# Altium PCB TDII_PCB(backup)_R00.PcbDoc
Units mm, origin at the board's own origin, x right, y up, seen from the top; angles counter-clockwise.
Board outline 45 x 70.5 mm, 2 copper layers (Top Layer, Bottom Layer); 84 components, 68 nets, 353 pads, 59 vias.
Unrouted connection lines stored in the file: 46.
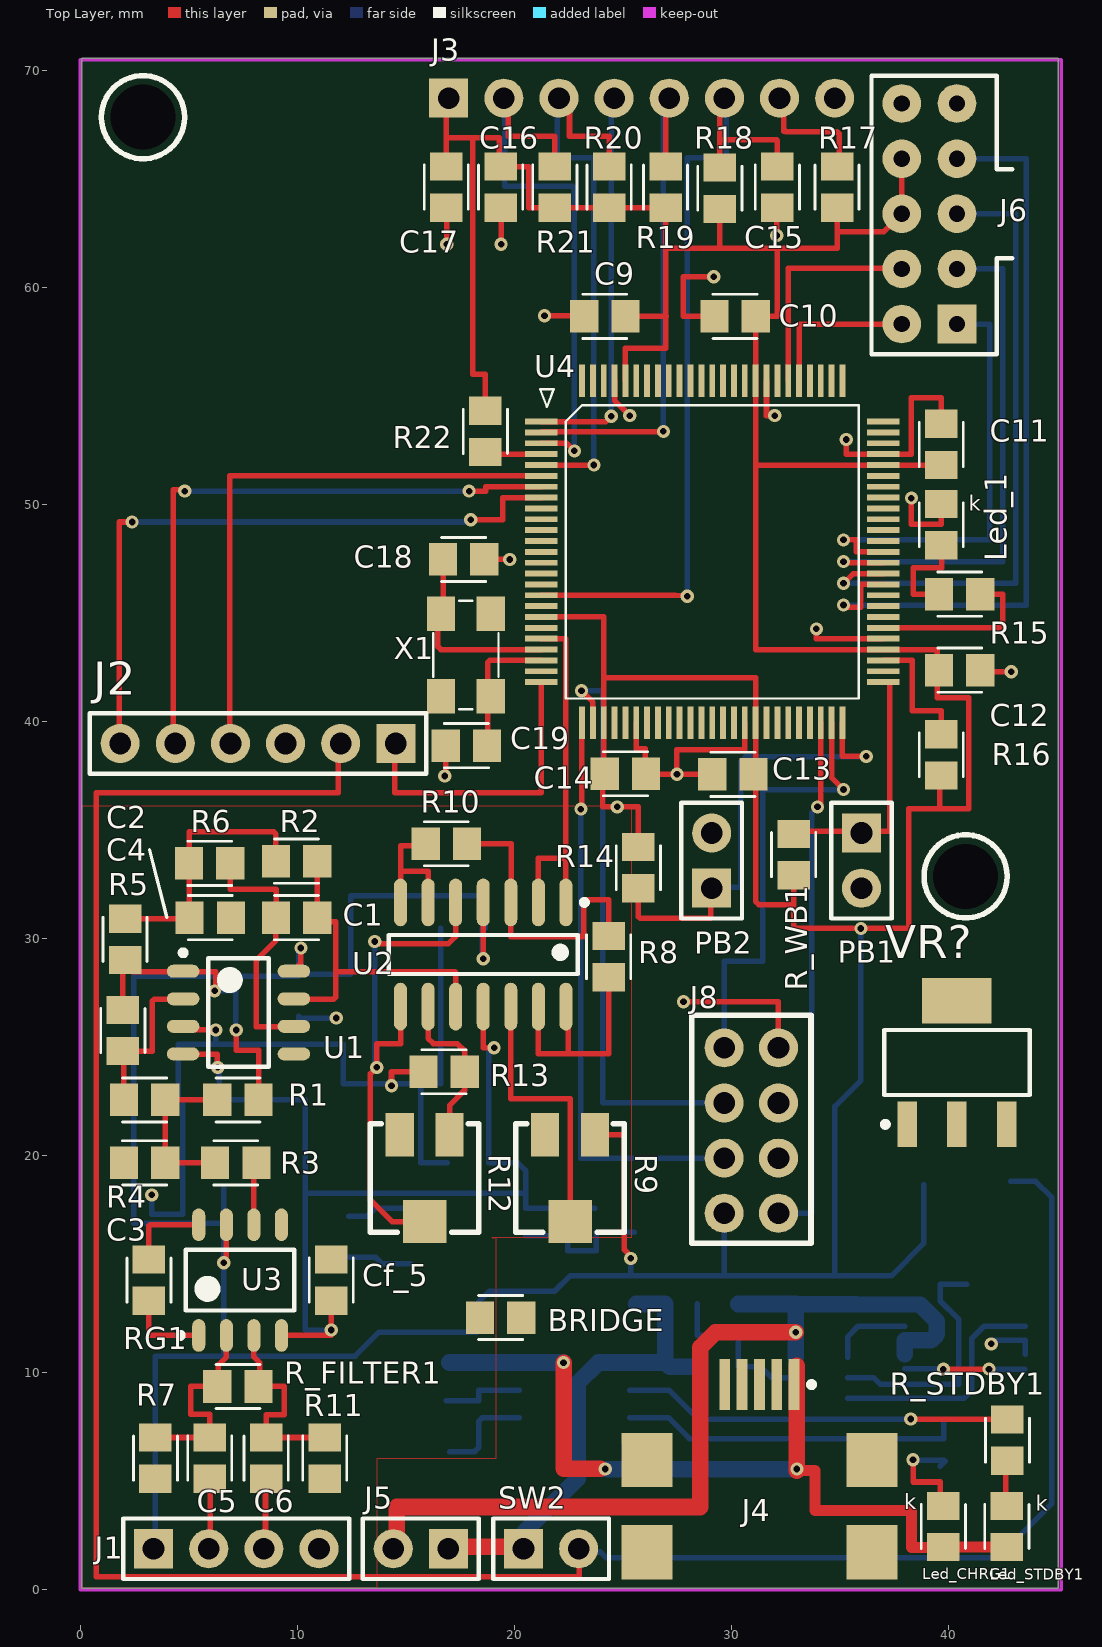
[diagram p0: Top Layer view]
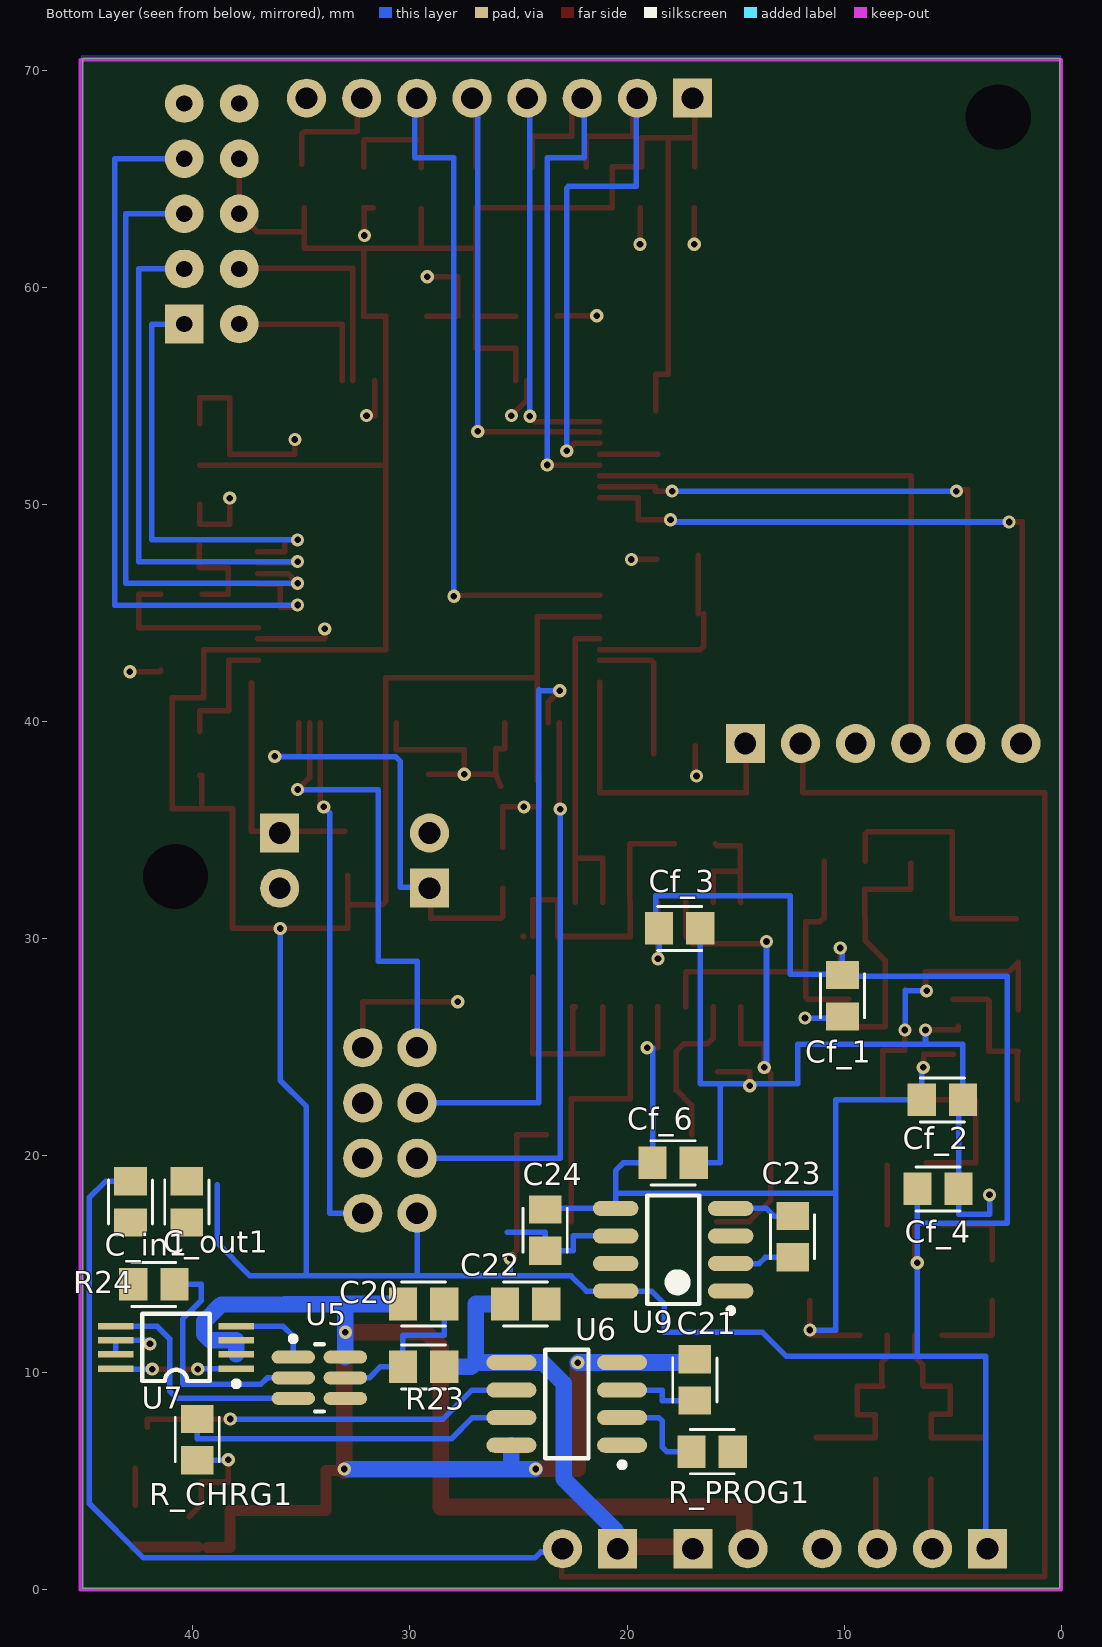
[diagram p1: Bottom Layer view, seen from below]

## Layer stack, top to bottom
Top Layer: signal copper 0.0356
Dielectric: dielectric 0.32, FR-4, Dk 4.8
Bottom Layer: signal copper 0.0356

## Board outline
0.075,0.075 0.075,70.575 45.075,70.575 45.075,0.075

## Design rules (kind name [scope] priority, off if disabled: settings)
Clearance Clearance_3 [InPolygon] p1: gap=0.406
Clearance [All] p2: gap=0.152
PolygonConnect [All] p1: connectstyle=Relief reliefconductorwidth=0.254 reliefentries=4 polygonreliefangle="90 Angle"
RoutingVias [All] p1: holewidth=0.305 width=0.61 viastyle="Through Hole" minholewidth=0.305 minwidth=0.61 maxholewidth=0.305 maxwidth=0.61
SilkscreenOverComponentPads [All] p1: minsilkscreentomaskgap=0.254
SolderMaskExpansion [All] p1: expansion=0.102
Width Width_1 [InNet('+VCC_5V')] p1: maxlimit=1.27 minlimit=0.254 preferedwidth=0.762
Width [All] p2: maxlimit=1.27 minlimit=0.254 preferedwidth=0.254
27 further rules are at their usual default settings.

## Classes and differential pairs
component class U_TDII_TFT_R00: J6
component class U_TDII_ANALOG_R00: BRIDGE C1 C2 C3 C4 C5 C6 Cf_1 Cf_2 Cf_3 Cf_4 Cf_5 Cf_6 J1 R1 R2 R3 R4 R5 R6 R7 R8 R9 R10 R11 R12 R13 R_FILTER1 RG1 U1 U2 U3
component class U_TDII_CPU_R00: C9 C10 C11 C12 C13 C14 C15 C16 C17 C18 C19 J3 Led_1 PB1 PB2 R14 R15 R16 R17 R18 R19 R20 R21 R22 R_WB1 U4 X1
component class U_TDII_PWR_R00: C20 C21 C22 C23 C24 C_in1 C_out1 J4 J5 Led_CHRG1 Led_STDBY1 R23 R24 R_CHRG1 R_PROG1 R_STDBY1 SW2 U5 U6 U7 U9 VR?
component class U_TDII_WIFI_R00: J8
component class U_TDII_BT_R00: J2

## Components (designator, comment, footprint, x,y, rotation, side; value= is the part's Value field where it differs from the comment)
BRIDGE "Res1" R_0805 19.375,12.55 r0 top
C1 "15nF     6.3V     X7R" C_0805 9.975,30.975 r0 top
C2 "2.7nF     6.3V     X7R" C_0805 1.975,25.775 r90 top
C3 "39nF     6.3V     X7R" C_0805 2.975,19.675 r0 top
C4 "39nF     25V     X7R" C_0805 6,30.975 r180 top
C5 "10uF     6.3V     X7R" C_0805 5.975,6.075 r90 top
C6 "10uF     6.3V     X7R" C_0805 8.575,6.075 r90 top
C9 "100nF   25V   X7R" C_0805 24.175,58.675 r180 top
C10 "100nF   25V   X7R" C_0805 30.175,58.675 r180 top
C11 "100nF   25V   X7R" C_0805 39.675,52.775 r90 top
C12 "100nF   25V   X7R" C_0805 40.525,42.375 r0 top
C13 "100nF   25V   X7R" C_0805 30.075,37.575 r180 top
C14 "100nF   25V   X7R" C_0805 25.125,37.6 r0 top
C15 "100nF    25V     X7R" C_0805 32.125,64.625 r270 top
C16 "10nF    25V     X7R" C_0805 19.375,64.625 r270 top
C17 "100nF    25V     X7R" C_0805 16.875,64.625 r270 top
C18 "18pF   50V   COG" C_0805 17.675,47.475 r180 top
C19 "18pF   50V   COG" C_0805 17.8,38.9 r0 top
C20 "10uF    6.3V     X7R" C_0805 29.375,13.175 r0 bottom
C21 "10uF    6.3V     X7R" C_0805 16.875,9.675 r270 bottom
C22 "10uF    6.3V     X7R" C_0805 24.675,13.175 r180 bottom
C23 "10uF    6.3V     X7R" C_0805 12.375,16.275 r90 bottom
C24 "10uF    6.3V      X7R" C_0805 23.775,16.575 r270 bottom
C_in1 "100nF   6.3V     X7R" C_0805 42.875,17.875 r270 bottom
C_out1 "10uF    6.3V     X7R" C_0805 40.275,17.875 r270 bottom
Cf_1 "100nF     6.3V     X7R" C_0805 10.075,27.375 r90 bottom
Cf_2 "100nF     6.3V     X7R" C_0805 5.475,22.575 r0 bottom
Cf_3 "100nF     6.3V     X7R" C_0805 17.575,30.475 r0 bottom
Cf_4 "100nF     6.3V     X7R" C_0805 5.675,18.475 r0 bottom
Cf_5 "100nF     6.3V     X7R" C_0805 11.575,14.275 r90 top
Cf_6 "100nF     6.3V     X7R" C_0805 17.875,19.675 r0 bottom
J1 "SGN_IN" "1x4x2.54 Pin Header TH V" 7.2,1.9 r0 top
J2 "Header_6" "1x6x2.54 Pin Header TH V" 8.2,39 r180 top
J3 "Header M  0.1\" 1x8" Header_THT 25.875,68.725 r0 top
J4 "USB CONNECTOR" USB/SM0.8-4H5 31.3,5.6 r270 top
J5 "Conector Bateria" "1x2x2.54 Pin Header TH V" 15.7,1.9 r180 top
J6 "TFT_HEADER" H-2x5-0.1x0.1 40.4,63.4 r90 top
J8 "WIFI_HEADER" Header_WIFI 25.675,22.975 r0 top
Led_1 "Led Rojo" LED_0805 39.675,49.075 r90 top
Led_CHRG1 "LED" LED_0805 39.775,2.925 r90 top
Led_STDBY1 "LED" LED_0805 42.7,2.925 r90 top
PB1 "Push Button" "1x2x2.54 Pin Header TH V" 36,33.6 r270 top
PB2 "Push Button" "1x2x2.54 Pin Header TH V" 29.1,33.6 r90 top
R1 "68k     5%" R_0805 7.275,22.575 r0 top
R2 "27k     5%" R_0805 9.975,33.575 r0 top
R3 "68k     5%" R_0805 7.175,19.675 r180 top
R4 "56k     5%" R_0805 2.975,22.575 r0 top
R5 "27k    5%" R_0805 2.075,29.975 r270 top
R6 "27k     5%" R_0805 5.975,33.475 r180 top
R7 "100k       5%" R_0805 3.475,6.075 r270 top
R8 "10k     5%" R_0805 24.35,29.175 r90 top
R9 "100k   5%" POT4MM-2 22.575,18.975 r270 top
R10 "10k     5%" R_0805 16.875,34.375 r0 top
R11 "100k       5%" R_0805 11.275,6.075 r90 top
R12 "100k     5%" POT4MM-2 15.875,18.975 r270 top
R13 "4k7     5%" R_0805 16.775,23.875 r0 top
R14 "1k    5%" R_0805 25.725,33.275 r90 top
R15 "1k    5%" R_0805 40.525,45.875 r0 top
R16 "10k    5%" R_0805 39.675,38.475 r270 top
R17 "10k    5%" R_0805 34.875,64.625 r270 top
R18 "10k    5%" R_0805 29.475,64.575 r270 top
R19 "10k    5%" R_0805 26.975,64.625 r270 top
R20 "10k    5%" R_0805 24.375,64.625 r270 top
R21 "10k    5%" R_0805 21.875,64.625 r270 top
R22 "10k    5%" R_0805 18.675,53.375 r270 top
R23 "100     5%" R_0805 29.375,10.275 r0 bottom
R24 "1k    5%" R_0805 41.8,14.075 r180 bottom
R_CHRG1 "1k    10%" R_0805 39.8,6.925 r90 bottom
R_FILTER1 "100k       5%" R_0805 7.275,9.375 r180 top
R_PROG1 "1k2    5%" R_0805 16.075,6.375 r0 bottom
R_STDBY1 "1k    10%" R_0805 42.725,6.9 r270 top
R_WB1 "1k    5%" R_0805 32.875,33.875 r270 top
RG1 "100     5%" R_0805 3.175,14.275 r90 top
SW2 "ON/OFF" "1x2x2.54 Pin Header TH V" 21.7,1.9 r0 top
U1 "LM358M" NXP-SOIC8_L 7.3,26.6 r0 top
U2 "LM324M" M14A_N 18.575,29.275 r270 top
U3 "AD620" NXP-SOIC8_L 7.375,14.275 r90 top
U4 "LPC1769FBD100" LQFP100 29.125,47.825 r90 top
U5 "DW01-P" NXP-SOT1353-1_M 34.175,9.775 r180 bottom
U6 "TP4056" SOP8_M 22.775,8.575 r0 bottom
U7 "8205A" TSSOP8 40.775,11.175 r90 bottom
U9 "TL7660" NXP-SOIC8_M 17.875,15.675 r0 bottom
VR? "TLV1117-33CKVURG3" SOT223-4L 40.4,24.3 r90 top
X1 "ABM3C-12.000MHZ-D4Y-T" ABM3C 17.775,43.075 r90 top

## Footprints (in the part's own frame and the unit in brackets; to place one, negate y for a bottom-side part, rotate by r counter-clockwise, add the part's x,y. Pads: shape width x height; smd on the part's side, far side on the other; paste and mask are expansions set on the pad)
"1x2x2.54 Pin Header TH V" [mm] "1x2x2.54 Pin Header TH V"
  rect 1.8x1.8 hole 1: 1(-1.27,0)
  round 1.8 hole 1: 2(1.27,0)
  silkscreen extent -2.67,-1.4 2.67,1.4, body extent -2.54,-1.27 2.54,1.27, height 8.55
"1x4x2.54 Pin Header TH V" [mm] "1x4x2.54 Pin Header TH V"
  rect 1.8x1.8 hole 1: 1(-3.81,0)
  round 1.8 hole 1: 2(-1.27,0) 3(1.27,0) 4(3.81,0)
  silkscreen extent -5.21,-1.4 5.21,1.4, body extent -5.08,-1.27 5.08,1.27, height 8.55
"1x6x2.54 Pin Header TH V" [mm] "1x6x2.54 Pin Header TH V"
  rect 1.8x1.8 hole 1: 1(-6.35,0)
  round 1.8 hole 1: 2(-3.81,0) 3(-1.27,0) 4(1.27,0) 5(3.81,0) 6(6.35,0)
  silkscreen extent -7.75,-1.4 7.75,1.4, body extent -7.62,-1.27 7.62,1.27, height 8.55
ABM3C [mm]
  rect 1.6x1.3 smd: 1(1.9,1.15) 2(-1.9,1.15) 3(-1.9,-1.15) 4(1.9,-1.15)
  silkscreen extent -2.5,-1.5 2.5,1.5
C_0805 [mm]
  rect 1.3x1.5 smd: 1(-0.95,0) 2(0.95,0)
  silkscreen extent -1.02,-1.02 1.02,1.02
H-2x5-0.1x0.1 [mil] "Conector Header macho para circuito impreso de 10 pines con seguro, Pitch: 100mil (2.54 mm), Espaciado filas: 100mil (2.54 mm)"
  rect 70x70 hole 29.53: 1(-200,0)
  round 70 hole 29.53: 2(-200,100) 3(-100,0) 4(-100,100) 5(0,0) 6(0,100) 7(100,0) 8(100,100) 9(200,0) 10(200,100)
  silkscreen extent -255,-100 250,155
Header_THT [mm]
  rect 1.8x1.8 hole 1: 1(-8.89,0)
  round 1.8 hole 1: 2(-6.35,0) 3(-3.81,0) 4(-1.27,0) 5(1.27,0) 6(3.81,0) 7(6.35,0) 8(8.89,0)
Header_WIFI [mm]
  round 1.8 hole 1: 1(4,2) 2(4,-0.54) 3(4,-3.08) 4(4,-5.62) 5(6.5,2) 6(6.5,-0.54) 7(6.5,-3.08) 8(6.5,-5.62)
  silkscreen extent 2.5,-7 8,3.5
LED_0805 [mm]
  rect 1.3x1.5 smd: 1(-0.95,0) 2(0.95,0)
  silkscreen extent -1.02,-1.02 1.02,1.02
LQFP100 [mm]
  rect 0.27x1.5 smd: 1(6,7.875) 2(5.5,7.875) 3(5,7.875) 4(4.5,7.875) 5(4,7.875) 6(3.5,7.875) 7(3,7.875) 8(2.5,7.875) 9(2,7.875) 10(1.5,7.875) 11(1,7.875) 12(0.5,7.875) 13(0,7.875) 14(-0.5,7.875) 15(-1,7.875) 16(-1.5,7.875) 17(-2,7.875) 18(-2.5,7.875) 19(-3,7.875) 20(-3.5,7.875) 21(-4,7.875) 22(-4.5,7.875) 23(-5,7.875) 24(-5.5,7.875) 25(-6,7.875) 51(-6,-7.875) 52(-5.5,-7.875) 53(-5,-7.875) 54(-4.5,-7.875) 55(-4,-7.875) 56(-3.5,-7.875) 57(-3,-7.875) 58(-2.5,-7.875) 59(-2,-7.875) 60(-1.5,-7.875) 61(-1,-7.875) 62(-0.5,-7.875) 63(0,-7.875) 64(0.5,-7.875) 65(1,-7.875) 66(1.5,-7.875) 67(2,-7.875) 68(2.5,-7.875) 69(3,-7.875) 70(3.5,-7.875) 71(4,-7.875) 72(4.5,-7.875) 73(5,-7.875) 74(5.5,-7.875) 75(6,-7.875)
  rect 1.5x0.27 smd: 26(-7.875,6) 27(-7.875,5.5) 28(-7.875,5) 29(-7.875,4.5) 30(-7.875,4) 31(-7.875,3.5) 32(-7.875,3) 33(-7.875,2.5) 34(-7.875,2) 35(-7.875,1.5) 36(-7.875,1) 37(-7.875,0.5) 38(-7.875,0) 39(-7.875,-0.5) 40(-7.875,-1) 41(-7.875,-1.5) 42(-7.875,-2) 43(-7.875,-2.5) 44(-7.875,-3) 45(-7.875,-3.5) 46(-7.875,-4) 47(-7.875,-4.5) 48(-7.875,-5) 49(-7.875,-5.5) 50(-7.875,-6) 76(7.875,-6) 77(7.875,-5.5) 78(7.875,-5) 79(7.875,-4.5) 80(7.875,-4) 81(7.875,-3.5) 82(7.875,-3) 83(7.875,-2.5) 84(7.875,-2) 85(7.875,-1.5) 86(7.875,-1) 87(7.875,-0.5) 88(7.875,0) 89(7.875,0.5) 90(7.875,1) 91(7.875,1.5) 92(7.875,2) 93(7.875,2.5) 94(7.875,3) 95(7.875,3.5) 96(7.875,4) 97(7.875,4.5) 98(7.875,5) 99(7.875,5.5) 100(7.875,6)
  silkscreen extent -6.75,-6.75 7.49,7.94, body extent -8,-8 8,8, height 1.2
M14A_N [mm] "SOIC, 14-Leads, Body 8.6x3.9mm, Pitch 1.27mm, IPC Medium Density"
  oval 2.2x0.6 smd: 1(-2.4,3.81) 2(-2.4,2.54) 3(-2.4,1.27) 4(-2.4,0) 5(-2.4,-1.27) 6(-2.4,-2.54) 7(-2.4,-3.81) 8(2.4,-3.81) 9(2.4,-2.54) 10(2.4,-1.27) 11(2.4,0) 12(2.4,1.27) 13(2.4,2.54) 14(2.4,3.81)
  silkscreen extent -2.52,-4.35 0.9,4.79, body extent -2,-4.37 2,4.37, height 1.75
NXP-SOIC8_L [mm] "SOIC, 8-Leads, Body 5x4mm, Pitch 1.27mm, IPC High Density"
  oval 1.5x0.6 smd: 1(-2.55,1.905) 2(-2.55,0.635) 3(-2.55,-0.635) 4(-2.55,-1.905) 5(2.55,-1.905) 6(2.55,-0.635) 7(2.55,0.635) 8(2.55,1.905)
  silkscreen extent -2.67,-2.5 1.4,2.88, body extent -2,-2.5 2,2.5, height 1.73
NXP-SOIC8_M [mm] "SOIC, 8-Leads, Body 5x4mm, Pitch 1.27mm, IPC Low Density"
  oval 2.1x0.7 smd: 1(-2.65,1.905) 2(-2.65,0.635) 3(-2.65,-0.635) 4(-2.65,-1.905) 5(2.65,-1.905) 6(2.65,-0.635) 7(2.65,0.635) 8(2.65,1.905)
  silkscreen extent -2.77,-2.5 1.2,2.93, body extent -2,-2.5 2,2.5, height 1.73
NXP-SOT1353-1_M [mm] "SOP, 6-Leads, Body 3.1x1.7mm, Pitch 0.95mm, IPC Low Density"
  oval 2x0.6 smd: 1(-1.2,0.95) 2(-1.2,0) 3(-1.2,-0.95) 4(1.2,-0.95) 5(1.2,0) 6(1.2,0.95)
  silkscreen extent -1.33,-1.55 0.2,1.92, body extent -0.85,-1.55 0.85,1.55, height 1.1
POT4MM-2 [mm] "Square Trimming Potentiometer"
  rect 2x1.3 smd: CCW(-2,-1.15) CW(-2,1.15)
  rect 2x2 smd: W(2,0)
  silkscreen extent -2.5,-2.5 2.5,2.5
R_0805 [mm]
  rect 1.3x1.5 smd: 1(-0.95,0) 2(0.95,0)
  silkscreen extent -1.02,-1.02 1.02,1.02
SOP8_M [mm] "SOIC, 8-Leads, Body 4.9x3.9mm, Pitch 1.27mm, IPC Low Density"
  oval 2.3x0.7 smd: 1(-2.55,1.905) 2(-2.55,0.635) 3(-2.55,-0.635) 4(-2.55,-1.905) 5(2.55,-1.905) 6(2.55,-0.635) 7(2.55,0.635) 8(2.55,1.905)
  silkscreen extent -2.67,-2.5 1,2.93, body extent -2,-2.5 2,2.5, height 1.75
SOT223-4L [mm] "SOT223, 4-Leads, Body 6.5x3.5mm, Pitch 2.3mm, Lead Span 7mm, IPC High Density"
  rect 2.1x0.9 smd: 1(-2.85,2.3) 2(-2.85,0) 3(-2.85,-2.3)
  rect 2.1x3.2 smd: 4(2.85,0)
  silkscreen extent -2.97,-3.35 1.5,3.42, body extent -1.85,-3.35 1.85,3.35, height 1.7
TSSOP8 [mm] "Shrink Small Outline, Plastic, Thin; 8 Leads; Body Width 4.4 mm; Pitch 0.65 mm"
  rect 0.3x1.65 smd: 1(-0.975,-2.775) 2(-0.325,-2.775) 3(0.325,-2.775) 4(0.975,-2.775) 5(0.975,2.775) 6(0.325,2.775) 7(-0.325,2.775) 8(-0.975,2.775)
  silkscreen extent -1.8,-2.9 1.55,1.55
USB/SM0.8-4H5 [mm] "Connector; USB Mini-B, Sinking Type, SM; 5 Position; Right Angle"
  rect 2.35x0.5 smd: 1(-3.862,1.6) 2(-3.862,0.8) 3(-3.862,0) 4(-3.862,-0.8) 5(-3.862,-1.6)
  rect 2.5x2.35 smd: MH1(-0.387,-5.175) MH2(3.863,-5.175) MH3(3.863,5.175) MH4(-0.387,5.175)
  silkscreen extent -3.99,2.28 -3.74,2.53, body extent -1.8,-3.84 6.8,3.86, height 0.65

## Part data
BRIDGE: "Resistor"
C1 C2 C3 C4 C5 C6 C9 C10 C11 C12 C13 C14 C15 C16 C17 C18 C19 C20 C21 C22 C23 C24 C_in1 C_out1 Cf_1 Cf_2 Cf_3 Cf_4 Cf_5 Cf_6: library part CAP
J1: library part "Conector_4 ( 0.100\")"
J2: library part "Conector_6 ( 0.100¨)"
J3: library part Header
J4: library part USB_CONNECTOR
J5: library part "Conector_2 ( 0.100\")"
J6: library part "Conector_9 (0.100¨)"
J8: library part "Conector_8 ( 0.100¨)"
Led_1: library part LED
R1 R2 R3 R4 R5 R6 R7 R8 R10 R11 R13 R14 R15 R16 R17 R18 R19 R20 R21 R22 R23 R24 R_CHRG1 R_FILTER1 R_PROG1 R_STDBY1 R_WB1 RG1: library part RES
R9 R12: library part "RPot SM", "Square Trimming Potentiometer"
SW2: library part SWITCH, "Switch, generic"
U1: "Low Power Dual Operational Amplifier, 8-pin Narrow SOIC"
U2: "Low Power Quad Operational Amplifier, 14-pin Narrow SOIC"
U4: library part LPC1768FBD100, "CPU Cortex M3"
VR?: "LDO Voltage Regulators Sgl Output LDO 800mA Fixed Int Crnt limit"
X1: library part ABM3_CRISTAL

## Free pads (board coordinates)
  round 2.2 hole 3: 0(2.9,67.85) 1(40.8,32.875)

## Via types
v1: diameter 0.61, hole 0.305, Top Layer to Bottom Layer, 59 vias

## Nets (pads, with @x,y where several pads share a name; then routed paths per layer and width w, separated by ;. In a path a pad name is that pad's centre, name@x,y a point inside that pad or via, vN(x,y) a via of type N, cw(c..) or ccw(c..) an arc to the next point about the centre after c; other vN are vias at no path point)
+3V3: C9.1 C10.1 C11.1 C12.1 C13.1 C14.1 C16.1 C17.1 C_out1.1 Cf_1.2 Cf_3.2 Cf_4.2 J1.1 J3.1 J6.6 J6.8 J8.4 R9.CW R14.2 R16.2 R17.2 R18.2 R19.2 R20.2 R21.2 R22.1 R_WB1.2 U1.8 U2.4 U3.7 U4.19 U4.28 U4.42 U4.54 U4.71 U4.84 U4.96 U9.8 VR?.2 | length 287.4
  Top Layer w0.254: v1(6.625,15.075) 6.74,15.19 U3.7 ; U1.8@9.775,28.48 10.175,28.88 v1(10.175,29.575) ; C17.1 16.875,66.9 ; J3.1@17.185,68.725 J3.1 16.875,68.725 16.875,66.9 ; v1(18.575,29.075) U2.4 ; R22.1 18.675,56 18.1,56 18.1,66.9 ; U4.19 24.125,44.825 24.125,42.025 ; R9.CW 25.075,20.975 25.075,15.675 v1@25.425,15.325 ; C14.1@24.075,37.575 24.075,36.075 v1(24.75,36.075) 25.725,36.075 R14.2 ; C14.1@24.125,37.275 U4.28 24.125,42.025 ; U4.96 25.125,57.2 26.975,57.2 26.975,58.675 ; C9.1 26.975,58.675 ; 26.975,62.575 26.975,58.675 ; 27,58.675 26.975,58.675 ; R18.2 29.475,61.8 ; C10.1@31.125,58.625 U4.84 31.125,51.825 ; C10.1 32.125,58.675 32.125,61.8 ; R_WB1.2 32.875,31.575 ; R17.2 34.875,62.575 ; J6.8 J6.6 37.035,62.575 34.875,62.575 ; R16.2 39.6,37.525 39.6,36 ; C11.1 U4.71 31.125,51.825 ; 16.875,66.9 18.1,66.9 ; 18.1,66.9 19.319,66.9 19.319,65.575 C16.1 20.675,65.575 20.675,63.675 R21.2 R20.2 R19.2 26.975,61.8 29.475,61.8 ; 24.125,42.025 31.125,42.025 U4.42 31.125,31.725 31.275,31.575 32.875,31.575 ; 29.475,61.8 32.125,61.8 ; 31.125,51.825 31.125,43.325 U4.54 39.5,43.325 39.5,41.1 40.95,41.1 40.95,36 39.6,36 ; 32.125,61.8 34.875,61.8 34.875,62.575 ; 32.875,31.575 32.875,30.475 v1(35.975,30.475) 38.175,30.475 38.175,36 39.6,36
  Bottom Layer w0.254: J1.1@3.465,1.975 3.465,10.775 6.625,10.775 ; Cf_4.2 6.625,16.9 ; v1(10.175,29.575) 10.075,29.575 Cf_1.2@10.075,28.375 ; v1@18.525,29.075 Cf_3.2 18.675,30.475 18.675,31.975 12.475,31.975 12.475,28.375 Cf_1.2@10.075,28.375 ; v1(25.375,15.275) 25.375,14.575 25.275,14.475 ; 29.675,14.475 J8.4 ; 34.775,14.575 34.775,22.275 35.975,23.475 v1(35.975,30.475) ; 38.875,18.675 38.875,15.975 37.375,14.475 25.275,14.475 ; 6.625,10.775 v1(6.625,15.075) 6.625,16.9 ; 6.625,10.775 12.675,10.775 13.775,11.875 18.275,11.875 18.275,13.175 18.87,13.77 U9.8 21.87,13.77 22.575,14.475 25.275,14.475 ; 6.625,16.9 2.475,16.9 2.475,28.275 10.075,28.275 Cf_1.2 Cf_1.2@10.075,28.375
+BAT: C22.1 J5.1 R23.1 SW2.1 U6.5 | length 20.8
  Top Layer w0.762: J5.1@17.475,1.983 SW2.1@20.405,1.983
  Bottom Layer w0.762: SW2.1@20.49,2.69 22.925,5.125 22.925,9.525 23.88,10.48 U6.5 26.97,10.48 ; C22.1 26.97,13.175 26.97,10.48 ; R23.1 27.175,10.275 26.97,10.48
+VCC_5V: C21.1 J4.1 Led_CHRG1.1 Led_STDBY1.1 U6.4 U6.8 | length 39.2
  Top Layer w0.508: v1@33.025,5.5 33.87,5.5 33.87,3.655 38.3,3.655 38.3,1.95 Led_CHRG1.1@39.325,1.95 ; Led_CHRG1.1 Led_STDBY1.1
  Top Layer w0.762: v1(22.275,10.475) 22.275,5.575 v1@24,5.575 ; v1@33.025,5.5 v1(33.025,5.575) J4.1@33.025,10.325
  Bottom Layer w0.762: C21.1@17.02,10.48 U6.4 22.275,10.48 v1(22.275,10.475) ; v1@24.262,5.57 25.325,5.57 ; U6.8 25.325,5.57 ; v1@32.875,5.57 25.325,5.57
  other v1: 24.201,5.575
-3V3: C24.1 Cf_2.2 Cf_5.1 Cf_6.2 U1.4 U2.11 U3.4 U9.5 | length 47.8
  Top Layer w0.254: U1.4@4.975,24.67 6.33,24.67 v1@6.33,24.095 ; U3.4 11.575,11.725 v1(11.575,11.975) Cf_5.1 ; U2.11 18.575,24.975 v1(19.075,24.975)
  Bottom Layer w0.254: v1@6.425,23.925 Cf_2.2 10.375,22.575 10.375,18.275 ; v1(11.575,11.975) 10.375,11.975 10.375,18.275 ; v1(19.075,24.975) 18.825,24.975 Cf_6.2 20.175,19.675 20.525,19.325 20.525,18.2 ; C24.1@23.72,17.58 U9.5 20.525,17.675 20.525,18.2 ; 10.375,18.275 20.45,18.275 20.525,18.2
  other v1: 6.35,24.075
-BAT: C20.2 J5.2 U5.6 U7.2 U7.3 | length 42.8
  Top Layer w0.762: J5.2@14.935,1.983 14.6,2.318 14.6,3.823 28.575,3.823 28.575,11.175 29.275,11.875 v1(32.975,11.875)
  Bottom Layer w0.762: C20.2 32.975,13.175 ; U5.6 32.975,13.175 ; U7.2 U7.3 39.2,11.5 39.475,11.775 39.475,12.375 38.7,13.15 32.975,13.175
\T\R\S\T\: R22.2 U4.4 | length 2.7
  Top Layer w0.254: R22.2@18.575,52.325 19.875,52.325 U4.4
AGND: BRIDGE.1 C3.1 C4.1 Cf_1.1 Cf_2.1 Cf_3.1 Cf_4.1 Cf_5.2 Cf_6.1 J1.4 R7.2 R9.CCW R11.1 R13.1 U1.3 U1.5 U3.5 | length 43.1
  Top Layer w0.254: U1.3 4.75,25.8 v1(6.25,25.8) ; v1(14.35,23.225) 14.35,23.875 R13.1
  Bottom Layer w0.254: v1(3.3,18.2) 3.3,17.306 4.725,17.306 Cf_4.1 Cf_2.1@4.725,22.375 ; Cf_2.1 4.525,25.15 6.25,25.15 ; v1(6.25,25.8) 6.25,25.15 ; Cf_1.1 10.075,26.35 v1(11.8,26.35) ; Cf_3.1 16.625,23.325 ; Cf_6.1 15.7,19.675 15.7,23.325 16.625,23.325 ; 6.25,25.15 12.125,25.15 12.125,23.325 16.625,23.325
CS: J6.1 U4.63 | length 20.5
  Top Layer w0.254: v1(35.175,48.375) 35.759,48.375 35.759,47.825 U4.63
  Bottom Layer w0.254: v1(35.175,48.375) 41.9,48.375 41.9,58.32 J6.1
D/C: J6.4 U4.81 | length 10.8
  Top Layer w0.254: U4.81 32.625,60.9 37.9,60.9 J6.4@38.1,60.7
FILTRO_IN: R3.1 U3.6 | length 2.7
  Top Layer w0.254: U3.6 R3.1@8.01,19.56
FILTRO_OUT: C1.2 R2.2 U1.7 U2.10 | length 16.1
  Top Layer w0.254: U1.7@9.775,27.21 11.675,27.21 11.775,27.31 11.775,28.475 ; R2.2 C1.2 11.125,30.775 11.775,30.775 11.775,28.475 ; 17.275,28.475 11.775,28.475 ; U2.10 17.305,28.445
GND: BRIDGE.2 C9.2 C10.2 C11.2 C12.2 C13.2 C14.2 C15.2 C16.2 C17.2 C18.1 C19.1 C21.2 C22.2 C24.2 C_in1.2 C_out1.2 J2.3 J3.8 J4.5 J6.9 J8.5 Led_1.2 PB1.2 PB2.2 R24.1 R_PROG1.1 U4.31 U4.41 U4.55 U4.72 U4.83 U4.97 U6.1 U6.3 U7.6 U7.7 U9.3 U9.6 VR?.1 | length 66.8
  Top Layer w0.254: v1(16.8,37.5) 16.85,37.5 C19.1 ; v1(16.9,62) C17.2@16.9,63.675 ; C18.1 v1(19.8,47.475) ; v1(19.4,62) C16.2@19.4,63.675 ; v1(21.4,58.7) 23.225,58.7 C9.2 ; U4.97 24.625,54.8 v1(25.325,54.1) ; U4.31 25.625,38.75 26.05,38.75 26.05,37.575 C14.2@25.825,37.025 ; C14.2 26.075,37.575 v1(27.5,37.575) ; v1(27.8,27.1) 32.175,27.1 J8.5 ; C13.2 v1(27.5,37.575) ; v1(29.2,60.5) 27.8,60.5 27.8,58.675 C10.2 ; U4.41 30.625,38.7 27.5,38.7 v1(27.5,37.575) ; U4.83 31.625,54.1 v1(32,54.1) ; C15.2@31.694,63.675 C15.2@32.1,63.675 ; v1(32.1,62.4) C15.2@32.1,63.675 ; C15.2 C15.2@32.1,63.675 ; v1(33.925,44.275) 33.925,43.825 U4.55 ; v1(35.3,53) 35.3,52.325 U4.72 38.3,52.325 38.3,54.925 39.675,54.925 C11.2 ; v1(38.3,50.3) 38.3,49.1 39.675,49.1 Led_1.2 ; C12.2 41.475,42.3 v1(42.9,42.3)
  Bottom Layer w0.254: C21.2 18.375,8.725 18.375,9.21 U6.3 ; U9.6 22.475,16.31 22.475,15.625 C24.2 23.775,16.475 25.525,16.475 ; v1@41.975,11.175 v1(41.975,11.337) 41.975,11.5 U7.6 U7.7
ISP: R16.1 U4.53 | length 5.9
  Top Layer w0.254: U4.53 38.35,42.825 38.35,40.5 39.675,40.5 R16.1@39.675,39.55
MISO: J6.5 U4.61 | length 29.7
  Top Layer w0.254: v1(35.175,46.375) 35.625,46.825 U4.61
  Bottom Layer w0.254: v1(35.175,46.375) 43.1,46.375 43.1,63.4 J6.5
MOSI: J6.7 U4.60 | length 35.1
  Top Layer w0.254: v1@35.175,45.275 35.971,45.275 35.971,46.325 U4.60
  Bottom Layer w0.254: v1(35.175,45.375) 43.6,45.375 43.6,65.94 J6.7
NetC1_1: C1.1 R6.1 U1.6 | length 11.7
  Top Layer w0.254: R6.1 6.925,32.275 9.05,32.275 9.05,31 C1.1 9.025,29.925 8.109,29.009 8.109,25.941 ; 8.11,25.94 U1.6@9.775,25.94
NetC2_1: C2.1 R4.1 U1.2 | length 7.5
  Top Layer w0.254: C2.1 3.325,24.825 3.325,27.125 3.41,27.21 U1.2@4.975,27.21 ; R4.1 C2.1@2.025,24.775
NetC2_2: C2.2 R1.2 R5.2 U1.1 | length 14.5
  Top Layer w0.254: C2.2 1.975,28.925 2.42,28.48 6.25,28.48 v1@6.25,27.6 ; v1(7.2,25.8) 7.2,24.875 8.225,24.875 R1.2
  Bottom Layer w0.254: v1(6.2,27.6) 7.15,27.6 7.175,27.625 v1@7.175,25.875
NetC3_2: C3.2 R1.1 R3.2 R4.2 | length 7.6
  Top Layer w0.254: R3.2 C3.2 R4.2 R1.1
NetC4_2: C4.2 R2.1 R5.1 R6.2 | length 12.2
  Top Layer w0.254: R5.1 4.975,30.925 5.025,30.975 5.025,33.575 5.025,34.925 8.925,34.925 9.025,34.825 R2.1
NetC5_2: C5.2 R7.1 R_FILTER1.2 U3.2 | length 9.4
  Top Layer w0.254: R7.1 C5.2 5.975,8.1 5.1,8.1 5.1,9.375 R_FILTER1.2 ; R_FILTER1.2@6.375,9.425 6.375,10.375 6.74,10.74 U3.2
NetC6_2: C6.2 R11.2 R_FILTER1.1 U3.3 | length 9.5
  Top Layer w0.254: U3.3 8.01,10.74 8.275,10.475 8.275,9.425 R_FILTER1.1 9.4,9.375 9.4,8.075 8.575,8.075 C6.2 R11.2
NetC18_2: C18.2 U4.22 X1.1 | length 9
  Top Layer w0.254: X1.1@16.475,44.975 16.475,43.475 16.625,43.325 U4.22 ; X1.1@16.725,44.975 C18.2@16.725,47.675
NetC19_2: C19.2 U4.23 X1.3 | length 6.7
  Top Layer w0.254: C19.2@18.775,38.525 18.775,41.175 18.775,42.725 18.875,42.825 U4.23
NetC20_1: C20.1 R23.2 U5.5 | length 7.7
  Bottom Layer w0.254: C20.1 28.425,11.725 30.325,11.725 R23.2 31.375,10.275 31.875,9.775 U5.5
NetC23_1: C23.1 U9.2 | length 3
  Bottom Layer w0.254: C23.1 13.625,15.325 13.91,15.04 U9.2
NetC23_2: C23.2 U9.4 | length 3
  Bottom Layer w0.254: C23.2 13.225,17.225 13.58,17.58 U9.4
NetJ2_1: J2.1 U4.25 | length 14.1
  Top Layer w0.254: J2.1@14.5,39 14.5,36.725 21.25,36.725 U4.25
NetJ2_6: J2.6 U4.8 | length 30.6
  Top Layer w0.254: J2.6@1.8,39.15 1.8,49.2 v1(2.4,49.2) ; v1@17.975,49.3 v1(18,49.3) 19.475,49.3 19.475,50.325 U4.8
  Bottom Layer w0.254: v1(2.4,49.2) 17.9,49.2 v1(18,49.3)
NetJ3_7: J3.7 R17.1 | length 5.5
  Top Layer w0.254: J3.7@32.425,68.725 32.425,67.206 32.506,67.206 32.506,67.181 34.869,67.181 34.975,67.075 R17.1@34.975,65.675
NetJ8_2: J8.2 U4.27 | length 27.3
  Top Layer w0.254: v1(23.1,41.425) 23.625,40.9 U4.27
  Bottom Layer w0.254: v1(23.1,41.425) 24.025,41.425 24.075,41.475 24.075,22.435 J8.2
NetJ8_3: J8.3 U4.26 | length 26.7
  Top Layer w0.254: v1(23.075,35.975) 23.125,36.025 U4.26
  Bottom Layer w0.254: v1(23.075,35.975) 23.075,19.895 J8.3
NetLed_1_1: Led_1.1 R15.1 | length 4.8
  Top Layer w0.254: R15.1 38.375,45.875 38.375,47.1 39.7,47.1 39.7,48.125 Led_1.1
NetLed_CHRG1_2: Led_CHRG1.2 R_CHRG1.1 | length 5.9
  Top Layer w0.254: v1(38.375,6) 38.375,4.975 39.625,4.975 39.625,3.925 Led_CHRG1.2@40.175,3.375
  Bottom Layer w0.254: v1(38.375,6) 38.4,5.975 R_CHRG1.1 ; R_CHRG1.1@39.625,5.7 R_CHRG1.1@39.85,5.925
NetLed_STDBY1_2: Led_STDBY1.2 R_STDBY1.2 | length 1.7
  Top Layer w0.254: Led_STDBY1.2@42.65,3.9 R_STDBY1.2@42.65,5.6
NetR8_2: R8.2 R10.2 U2.3 | length 14.2
  Top Layer w0.254: R10.2 19.875,34.375 19.875,31.705 U2.3 19.845,30.105 23.2,30.105 23.2,31.8 24.35,31.8 R8.2 ; R8.2@24.755,30.105 R8.2@24.775,30.125
NetR9_W: R9.W U2.12 | length 12.6
  Top Layer w0.254: U2.12 19.845,22.625 22.575,22.625 R9.W
NetR12_CW: R12.CW R13.2 U2.9 | length 7.5
  Top Layer w0.254: U2.9 16.035,25.415 16.275,25.175 17.375,25.175 17.725,24.825 R13.2 17.725,23.025 17.025,22.325 R12.CW
NetR12_W: R12.W U2.5 U2.8 | length 24.4
  Top Layer w0.254: v1(13.575,29.875) 13.675,29.775 16.975,29.775 17.305,30.105 U2.5 ; U2.8 14.765,25.165 13.675,25.165 v1(13.675,24.075) 13.375,23.775 13.375,17.975 14.375,16.975 R12.W
  Bottom Layer w0.254: v1@13.575,23.975 v1(13.575,29.875)
NetR15_2: R15.2 U4.56 | length 8.1
  Top Layer w0.254: U4.56 42.5,44.325 42.5,45.875 R15.2
NetR24_2: R24.2 U5.2 | length 11.4
  Bottom Layer w0.254: U5.2 36.575,9.775 36.875,9.475 40.475,9.475 40.475,12.475 39.625,13.325 39.625,14.075 R24.2
NetR_CHRG1_2: R_CHRG1.2 U6.7 | length 15.7
  Bottom Layer w0.254: U6.7 27.11,7.94 28.075,6.975 39.8,6.975 R_CHRG1.2@39.8,7.8
NetR_PROG1_2: R_PROG1.2 U6.2 | length 4.6
  Bottom Layer w0.254: R_PROG1.2 18.175,6.375 18.375,6.575 18.375,7.775 18.54,7.94 U6.2
NetR_STDBY1_1: R_STDBY1.1 U6.6 | length 17.7
  Top Layer w0.254: v1(38.275,7.875) 42.1,7.875 R_STDBY1.1@42.1,7.5
  Bottom Layer w0.254: U6.6 27.14,9.21 28.475,7.875 v1(38.275,7.875)
NetRG1_1: RG1.1 U3.1 | length 3.9
  Top Layer w0.254: RG1.1 3.175,11.775 3.225,11.725 U3.1
NetRG1_2: RG1.2 U3.8 | length 3.9
  Top Layer w0.254: RG1.2 3.175,16.775 3.225,16.825 U3.8
NetU2_1: U2.1 U2.2 U4.21 | length 16.6
  Top Layer w0.254: U2.2 21.115,33.7 22.385,33.7 ; U4.21 22.385,43.825 22.385,33.7 ; U2.1 22.385,33.7
NetU5_1: U5.1 U7.4 | length 3.8
  Bottom Layer w0.254: U5.1 35.375,11.675 35.85,12.15 U7.4
NetU5_3: U5.3 U7.5 | length 11
  Bottom Layer w0.254: U5.3 40.725,8.825 41.075,9.175 41.075,11.575 41.65,12.15 U7.5
NetU7_1: U7.1 U7.8 | length 5.5
  Top Layer w0.254: v1(39.775,10.175) v1(41.875,10.175)
  Bottom Layer w0.254: U7.1 v1@39.75,10.2 ; v1(41.875,10.175) U7.8@43.525,10.175
OFFSET_OUT: R8.1 U2.13 U2.14 | length 11.2
  Top Layer w0.254: U2.13 21.115,24.7 22.5,24.7 ; U2.14 22.5,26.875 22.5,24.7 ; R8.1 24.35,24.7 22.5,24.7
ON/OFF_TX: PB2.1 R14.1 U4.50 | length 22
  Top Layer w0.254: R14.1 25.725,31.025 25.8,30.95 29.05,30.95 PB2.1@29.05,32.455 ; U4.50 35.125,38.4 v1(36.225,38.4) v1@36.225,38.375
  Bottom Layer w0.254: PB2.1@28.925,32.38 30.445,32.38 30.445,38.17 30.65,38.375 v1@36.225,38.375
RESET: J6.2 U4.80 | length 7.6
  Top Layer w0.254: U4.80 33.125,58.32 J6.2@38.1,58.32
RST: C15.1 J3.6 R18.1 U4.17 | length 38.6
  Top Layer w0.254: U4.17 27.425,45.825 v1(27.975,45.775) ; R18.1 J3.6@29.475,68.725 ; 29.475,66.8 32.1,66.8 32.125,66.775 C15.1
  Bottom Layer w0.254: v1(27.975,45.775) 27.975,65.975 29.775,65.975 29.775,68.635 J3.6 ; J3.6@29.875,68.715 J3.6@29.885,68.725
RX2_BT: J2.5 U4.7 | length 28.8
  Top Layer w0.254: J2.5@4.3,39.11 4.3,50.675 4.825,50.675 v1(4.825,50.625) ; v1(17.925,50.625) 18.7,50.625 18.7,50.825 U4.7
  Bottom Layer w0.254: v1(4.825,50.625) v1(17.925,50.625)
RX2_CPU: J8.1 U4.49 | length 20.7
  Top Layer w0.254: U4.49 34.625,37.425 v1(35.175,36.875)
  Bottom Layer w0.254: J8.1 29.675,28.975 31.45,28.975 31.45,36.875 v1(35.175,36.875)
RX2_WIFI: J8.8 U4.48 | length 24.2
  Top Layer w0.254: v1@34.125,36.075 U4.48
  Bottom Layer w0.254: J8.8 33.7,17.355 33.7,35.8 v1(33.975,36.075)
RX3_CPU: J2.4 U4.6 | length 26.5
  Top Layer w0.254: J2.4@6.9,39.17 6.9,51.325 U4.6
SCK: J6.3 U4.62 | length 24.8
  Top Layer w0.254: v1(35.175,47.375) 35.175,47.325 U4.62
  Bottom Layer w0.254: v1(35.175,47.375) 42.5,47.375 42.5,60.86 J6.3
SGN+_IN: C6.1 J1.3 | length 3.1
  Top Layer w0.254: J1.3@8.545,1.975 C6.1@8.545,5.095
SGN-_IN: C5.1 J1.2 | length 3.1
  Top Layer w0.254: J1.2@6.005,1.975 C5.1@6.005,5.095
SGN_OUT: R10.1 U2.6 U2.7 | length 6.5
  Top Layer w0.254: U2.7 14.785,31.7 14.785,33.1 ; R10.1 15.84,34.29 14.785,34.29 14.785,33.1 ; U2.6 16.035,33.1 14.785,33.1
TCK/SWDCLK: J3.3 R20.1 U4.5 | length 26.2
  Top Layer w0.254: U4.5 v1(23.675,51.825) ; J3.3@22.265,68.725 22.55,68.44 22.55,66.975 24.375,66.975 R20.1
  Bottom Layer w0.254: J3.3 21.975,68.635 21.975,65.975 23.675,65.975 v1(23.675,51.825)
TDI: J3.5 R19.1 U4.2 | length 24
  Top Layer w0.254: U4.2 21.284,53.359 v1@26.875,53.359 ; R19.1 26.975,68.725 J3.5 J3.5@27.345,68.725
  Bottom Layer w0.254: v1(26.875,53.375) J3.5@26.875,68.255
TDO/SWO: J3.4 U4.1 | length 17.3
  Top Layer w0.254: U4.1 24.225,53.825
  Bottom Layer w0.254: v1(24.475,54.075) J3.4@24.475,68.395
TMS/SWDIO: J3.2 R21.1 U4.3 | length 26.3
  Top Layer w0.254: J3.2@19.725,68.725 19.725,66.975 21.875,66.975 R21.1 ; U4.3 22.425,52.825 v1(22.775,52.475)
  Bottom Layer w0.254: J3.2 19.575,68.675 19.575,64.675 22.7,64.675 ; v1(22.775,52.475) 22.775,64.575
VCC: C_in1.1 J2.2 SW2.2 VR?.3 | length 112.9
  Top Layer w0.254: J2.2@12.2,38.9 11.9,38.6 11.9,36.725 0.75,36.725 0.75,0.6 23,0.6 23,1.23 SW2.2@23.745,1.975
  Bottom Layer w0.254: SW2.2@22.875,1.75 23.97,1.75 24.245,1.475 42.275,1.475 44.775,3.975 44.775,18.075 44.025,18.825 C_in1.1
WIFI/BT: PB1.1 R_WB1.1 U4.51 | length 11.2
  Top Layer w0.254: R_WB1.1@32.995,34.945 35.975,34.945 37.3,34.945 U4.51@37.3,41.8
pads on no net: J4.2 J4.3 J4.4 J4.MH1 J4.MH2 J4.MH3 J4.MH4 J6.10 J8.6 J8.7 R12.CCW U4.9 U4.10 U4.11 U4.12 U4.13 U4.14 U4.15 U4.16 U4.18 U4.20 U4.24 U4.29 U4.30 U4.32 U4.33 U4.34 U4.35 U4.36 U4.37 U4.38 U4.39 U4.40 U4.43 U4.44 U4.45 U4.46 U4.47 U4.52 U4.57 U4.58 U4.59 U4.64 U4.65 U4.66 U4.67 U4.68 U4.69 U4.70 U4.73 U4.74 U4.75 U4.76 U4.77 U4.78 U4.79 U4.82 U4.85 U4.86 U4.87 U4.88 U4.89 U4.90 U4.91 U4.92 U4.93 U4.94 U4.95 U4.98 U4.99 U4.100 U5.4 U9.1 U9.7 VR?.4 X1.2 X1.4

## Polygon pours and split planes (outlines as drawn)
AGND on Top Layer "Bottom Layer-No Net" (solid, shelved, pour order 10): 0.1,0.1 0.1,36.125 23.877,36.125 25.4,36.125 25.4,16.487 25.4,16.225 18.972,16.225 19.152,16.225 19.152,6.052 13.834,6.052 13.679,6.052 13.679,0.126
GND on Bottom Layer "Bottom Layer-No Net" (solid, remove dead copper, shelved, pour order 14): 0.025,0.025 0.025,70.65 45.125,70.65 45.15,70.65 45.15,0.075

## Keep-outs
Keep-Out Layer:
  lines w0.156: 0,0 0,70.5 45.2,70.5 45.2,0 0,0

## Silkscreen, mask and mechanical layers (free items; w line width, h text height)
Top Overlay:
  circle w0.254: c2.9,67.85 r1.916
  circle w0.254: c40.8,32.875 r1.916
  lines w0.156: 3.2,34.1 4,31
Mechanical 1:
  lines w0.254: -0.5,-0.5 45.7,-0.5 45.7,71 -0.5,71 -0.5,-0.5
Mechanical 13:
  lines w0.254: -3.126,72.301 -2.619,73.826 ; -3.105,38.349 -2.596,36.826 ; -2.873,73.826 -2.365,73.826 ; -2.85,36.826 -2.342,36.826 ; -2.611,60.43 -2.619,73.826 ; -2.605,50.222 -2.596,36.826 ; -2.11,72.302 -2.619,73.826 ; -2.089,38.35 -2.596,36.826 ; -0.001,73.913 -0.001,74.421 ; 0.075,-2.179 0.075,-1.671 ; 1.523,73.659 -0.001,74.167 ; 1.523,74.675 -0.001,74.167 ; 1.599,-2.433 0.075,-1.925 ; 1.599,-1.417 0.075,-1.925 ; 2.522,74.167 -0.001,74.167 ; 12.476,74.167 14.999,74.167 ; 13.475,73.659 14.999,74.167 ; 13.475,74.675 14.999,74.167 ; 14.999,73.913 14.999,74.421 ; 17.471,-1.925 0.075,-1.925 ; 25.067,15.276 25.575,13.752 ; 25.067,27.228 25.575,28.752 ; 25.321,13.752 25.829,13.752 ; 25.321,28.752 25.829,28.752 ; 25.575,16.275 25.575,13.752 ; 25.575,26.229 25.575,28.752 ; 26.083,15.276 25.575,13.752 ; 26.083,27.228 25.575,28.752 ; 27.025,12.335 27.025,12.843 ; 27.679,-1.925 45.075,-1.925 ; 28.549,12.081 27.025,12.589 ; 28.549,13.097 27.025,12.589 ; 34.421,12.589 27.025,12.589 ; 42.335,18.775 44.875,18.775 ; 43.351,18.267 44.875,18.775 ; 43.351,19.283 44.875,18.775 ; 43.551,-2.433 45.075,-1.925 ; 43.551,-1.417 45.075,-1.925 ; 44.629,12.589 52.025,12.589 ; 44.875,18.521 44.875,19.029 ; 45.075,-2.179 45.075,-1.671 ; 47.067,2.099 47.575,0.575 ; 47.067,69.051 47.575,70.575 ; 47.321,0.575 47.829,0.575 ; 47.321,70.575 47.829,70.575 ; 47.575,30.471 47.575,0.575 ; 47.575,40.679 47.575,70.575 ; 48.083,2.099 47.575,0.575 ; 48.083,69.051 47.575,70.575 ; 50.501,12.081 52.025,12.589 ; 50.501,13.097 52.025,12.589 ; 51.875,18.521 51.875,19.029 ; 52.025,12.335 52.025,12.843 ; 53.399,18.267 51.875,18.775 ; 53.399,19.283 51.875,18.775 ; 54.415,18.775 51.875,18.775
  text "15 (mm)" at 2.776,73.253 h1.52
  text "37 (mm)" at -3.525,60.175 h1.52 r270.04
  text "70 (mm)" at 48.489,30.725 h1.52 r90
  text "15 (mm)" at 26.489,16.529 h1.52 r90
  text "7 (mm)" at 44.287,15.118 h1.52
  text "25 (mm)" at 34.675,11.675 h1.52
  text "45 (mm)" at 17.725,-2.839 h1.52
Mechanical 15:
  region: 51.975,28.775 26.975,28.775 26.975,13.775 51.975,13.775
  rectangle: 0.723,37.6 15.7,74.6

## Text inside footprints (layer, text, board x,y; h text height)
Led_1: Top Overlay "k" at 40.95,49.725 h0.7
Led_CHRG1: Top Overlay "k" at 37.975,3.725 h0.7
Led_STDBY1: Top Overlay "k" at 44.025,3.65 h0.7